# Altium PCB KATADC_V1-3.PcbDoc (part 2 of 7)
Units mm, origin at the board's own origin, x right, y up, seen from the top; angles counter-clockwise.
Board outline 127 x 85.85 mm, 6 copper layers (Top Layer, InnerPlane1, InnerPlane2, InnerPlane3, InnerPlane4, Bottom Layer), stack 1.255 mm thick; 189 components, 188 nets, 905 pads, 1090 vias.
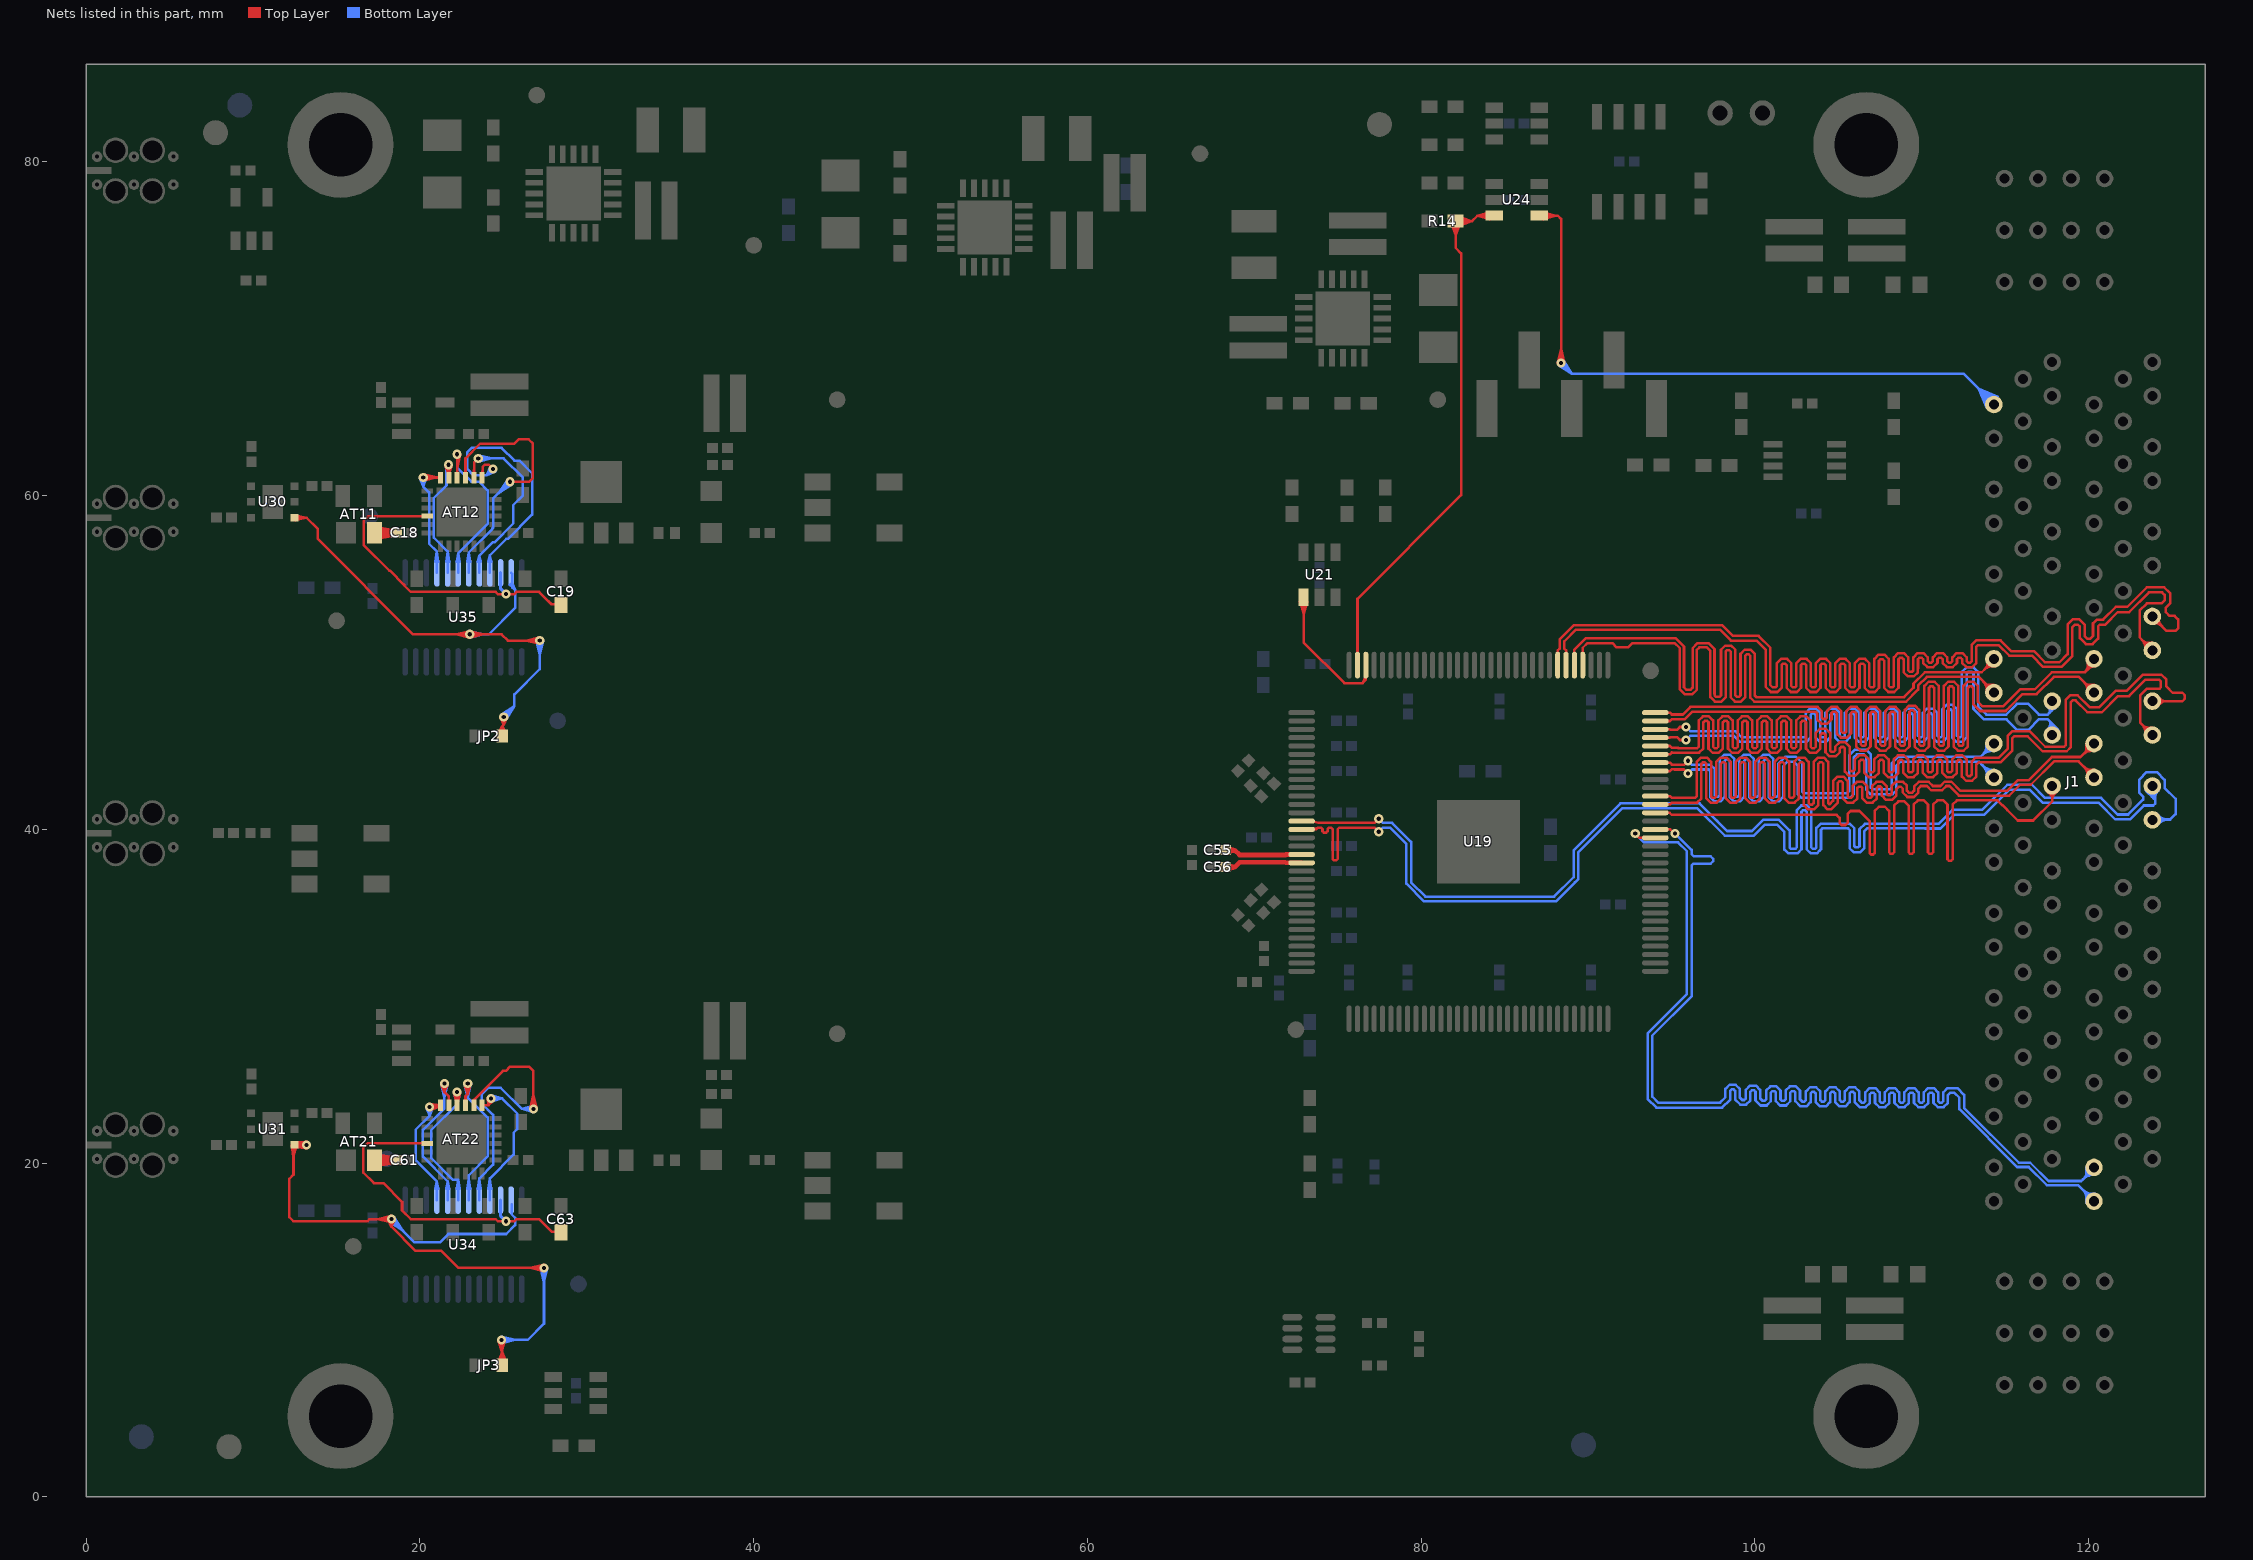
[diagram p6: the nets of this part, all layers, seen from the top]

## Via types
v1: diameter 0.55, hole 0.25, Top Layer to Bottom Layer, tented both sides, 1066 vias
v2: diameter 3.302, hole 2.2, Top Layer to Bottom Layer, tented both sides, 18 vias
v3: diameter 0.65, hole 0.25, Top Layer to Bottom Layer, tented both sides, 4 vias
v4: diameter 0.51, hole 0.25, Top Layer to Bottom Layer, tented both sides, 1 vias
v5: diameter 0.55, hole 0.25, Top Layer to Bottom Layer, 1 vias

## Nets (pads, with @x,y where several pads share a name; then routed paths per layer and width w, separated by ;. In a path a pad name is that pad's centre, name@x,y a point inside that pad or via, vN(x,y) a via of type N, cw(c..) or ccw(c..) an arc to the next point about the centre after c; other vN are vias at no path point) (continued)
CALRUN_19: U19.126 U21.1 | length 11.6
  Top Layer w0.152: U21.1@72.743,53.637 72.964,52.913 ; U21.1@72.964,53.67 72.964,52.913 ; U21.1@72.964,53.895 72.964,51.201 75.397,48.768 76.49,48.768 ; U21.1@73.185,53.637 72.964,52.913 ; U19.126@76.689,49.843 76.689,48.967 ; 76.49,48.768 76.689,48.967 ; 76.49,48.768 U19.126@76.689,49.193 ; 76.689,48.967 U19.126@76.689,49.193 ; 76.689,48.967 U19.126@76.689,49.193
CH1: AT11.2 C18.1 | length 7.9
  Top Layer w0.443: C18.1@18.575,57.764 AT11.2@17.272,57.764 C18.1@18.6,57.764 ; C18.1@18.575,57.764 17.291,57.986 C18.1@18.6,57.764 ; C18.1@18.575,57.764 17.291,57.542 C18.1@18.6,57.764
CH1_DAD0: AT12.24 U35.4 | length 12.3
  Top Layer w0.152: v1(20.193,61.087) 21.206,61.087 AT12.24@21.229,61.064 20.62,61.087 ; v1@20.217,60.89 21.027,61.087 v1@20.217,61.284
  Bottom Layer w0.152: v1@19.998,61.05 20.193,60.552 ; v1(20.193,61.087) 20.193,60.552 ; v1@20.388,61.05 20.193,60.552 ; U35.4@20.93,56.039 21.018,56.646 ; U35.4@21.018,55.372 21.018,56.646 ; U35.4@21.018,56.032 21.018,56.646 ; U35.4@21.107,56.039 21.018,56.646 ; 20.193,60.552 20.547,60.198 20.547,57.117 21.018,56.646
CH1_DAD1: AT12.23 U35.5 | length 13
  Top Layer w0.152: v1@21.522,61.811 AT12.23@21.729,61.264 ; v1@21.914,61.819 AT12.23@21.729,61.264 ; v1(21.717,61.849) v1@21.729,61.837 ; v1(21.717,61.849) AT12.23@21.729,61.064 v1@21.729,61.837 ; v1(21.717,61.849) AT12.23@21.729,61.264 ; AT12.23@21.729,61.264 v1@21.729,61.837
  Bottom Layer w0.152: U35.5@21.565,56.039 21.653,56.654 ; U35.5@21.653,55.372 21.653,56.654 ; U35.5@21.653,56.032 21.653,56.654 ; v1(21.717,61.849) 21.717,61.75 21.59,61.623 21.59,60.618 20.827,59.855 20.827,57.48 21.653,56.654 ; U35.5@21.742,56.039 21.653,56.654
CH1_DAD2: AT12.22 U35.6 | length 14.1
  Top Layer w0.152: AT12.22@22.229,61.064 22.229,62.48 v1(22.225,62.484) 22.229,61.65 v1@22.422,62.461 ; AT12.22@22.229,61.264 22.229,61.872
  Bottom Layer w0.152: U35.6@22.2,56.04 22.288,56.533 ; v1(22.225,62.484) 22.225,61.684 23.076,60.833 23.536,60.833 24.059,60.31 24.059,59.774 24.057,59.772 24.057,58.933 24.059,58.931 24.059,58.303 22.288,56.533 ; U35.6@22.288,55.372 22.288,56.533 ; U35.6@22.288,56.032 22.288,56.533 ; U35.6@22.377,56.04 22.288,56.533
CH1_DAD3: AT12.21 U35.7 | length 21
  Top Layer w0.152: AT12.21@22.729,61.064 22.729,62.226 23.61,63.107 23.888,63.107 23.894,63.113 25.654,63.113 25.914,63.373 26.518,63.373 26.772,63.119 26.772,61.043 26.561,60.833 v1(25.4,60.833) ; AT12.21@22.729,61.264 22.729,61.872
  Bottom Layer w0.152: U35.7@22.835,56.04 22.924,56.587 ; U35.7@22.924,55.372 22.924,56.587 ; U35.7@22.924,56.032 22.924,56.587 ; U35.7@23.012,56.04 22.924,56.587 ; v1@25.246,60.959 24.7,60.133 ; v1@25.526,60.679 24.7,60.133 ; 22.924,56.587 24.339,58.002 24.339,58.039 24.384,58.084 24.384,59.817 v1(25.4,60.833) 24.7,60.133
CH1_DAD4: AT12.20 U35.8 | length 14.6
  Top Layer w0.152: AT12.20@23.229,61.064 23.241,61.076 23.241,61.976 v1(23.495,62.23) ; AT12.20@23.229,61.264 23.241,61.872
  Bottom Layer w0.152: U35.8@23.47,56.043 23.558,56.401 ; v1(23.495,62.23) 25.019,62.23 26.162,61.087 26.162,60.008 25.59,59.436 25.59,58.333 24.454,57.196 24.354,57.196 23.558,56.401 ; v1@23.519,62.033 24.329,62.23 v1@23.519,62.427 ; U35.8@23.558,55.372 23.558,56.401 ; U35.8@23.558,56.032 23.558,56.401 ; U35.8@23.647,56.043 23.558,56.401
CH1_DAD5: AT12.19 U35.9 | length 18.7
  Top Layer w0.152: AT12.19@23.729,61.064 23.749,61.084 23.749,61.722 ; AT12.19@23.729,61.264 23.749,61.722 ; v1(24.384,61.595) 24.13,61.849 23.876,61.849 23.749,61.722
  Bottom Layer w0.152: U35.9@24.105,56.042 24.194,56.426 ; U35.9@24.194,55.372 24.194,56.426 ; U35.9@24.194,56.032 24.194,56.426 ; v1@24.22,61.707 24.003,61.214 ; U35.9@24.282,56.042 24.194,56.426 ; v1(24.384,61.595) 24.003,61.214 ; v1@24.496,61.431 24.003,61.214 ; 24.003,61.214 23.217,61.214 22.836,61.595 22.836,62.611 23.09,62.865 24.892,62.865 25.654,62.103 25.955,62.103 26.717,61.341 26.717,58.855 25.266,57.404 25.171,57.404 24.194,56.426
CH1_DALE: AT12.4 C19.1 U35.10 | length 20.9
  Top Layer w0.152: 19.622,58.764 AT12.4@20.229,58.764 ; AT12.4@20.429,58.764 16.892,58.764 16.624,58.496 16.624,57.033 18.158,55.499 18.199,55.499 19.05,54.648 19.05,54.627 19.448,54.229 24.535,54.229 24.662,54.102 v1(25.146,54.102) 25.654,54.102 25.781,54.229 27.146,54.229 27.712,53.663 ; 27.813,53.562 27.712,53.663 ; C19.1@28.4,53.5 27.875,53.5 27.712,53.663
  Bottom Layer w0.2: U35.10@24.828,55.372 24.828,54.422 v1(25.146,54.102) v1@25.15,54.1
CH1_TERM: JP2.2 U30.4 U35.11 | length 48.3
  Top Layer w0.152: U30.4@12.476,58.674 13.208,58.674 13.861,58.021 13.861,57.422 19.595,51.689 v1(22.987,51.689) 24.892,51.689 25.273,51.308 v1(27.178,51.308) ; U30.4@12.501,58.674 13.183,58.674 ; U30.4@12.517,58.526 13.183,58.674 ; U30.4@12.517,58.822 13.183,58.674 ; v1@22.963,51.492 22.153,51.689 v1@22.963,51.886 ; v1@23.011,51.492 23.821,51.689 v1@23.011,51.886 ; JP2.2@24.665,45.712 24.93,46.183 ; JP2.2@24.809,45.657 24.93,46.183 ; v1@24.825,46.693 25.019,46.272 ; JP2.2@24.93,45.593 24.93,46.183 ; JP2.2@24.93,45.643 24.93,46.183 ; v1(25.019,46.736) 25.019,46.272 ; JP2.2@25.051,45.657 24.93,46.183 ; JP2.2@25.195,45.712 24.93,46.183 ; v1@25.213,46.693 25.019,46.272 ; v1@27.154,51.111 26.344,51.308 v1@27.154,51.505 ; 24.93,46.183 25.019,46.272
  Bottom Layer w0.152: v1(22.987,51.689) 24.123,51.689 25.701,53.267 25.701,54.332 ; v1@23.011,51.492 23.821,51.689 v1@23.011,51.886 ; v1@24.895,46.891 25.661,47.378 ; v1(25.019,46.736) 25.661,47.378 ; v1@25.174,46.612 25.661,47.378 ; U35.11@25.393,54.657 25.701,54.332 ; U35.11@25.463,54.712 25.701,54.332 ; U35.11@25.463,55.372 25.539,55.296 25.539,54.494 25.701,54.332 ; U35.11@25.543,54.751 25.701,54.332 ; v1@26.981,51.284 27.178,50.474 ; v1@27.375,51.284 27.178,50.474 ; 25.661,47.378 25.661,48.09 27.178,49.608 v1(27.178,51.308) 27.178,50.474
CH2: AT21.2 C61.1 | length 7.9
  Top Layer w0.443: C61.1@18.575,20.172 AT21.2@17.272,20.172 C61.1@18.6,20.172 ; C61.1@18.575,20.172 17.291,20.394 C61.1@18.6,20.172 ; C61.1@18.575,20.172 17.291,19.95 C61.1@18.6,20.172
CH2_DAD0: AT22.24 U34.4 | length 14.8
  Top Layer w0.152: v1@20.572,23.567 AT22.24@21.229,23.472 ; v1@20.596,23.566 AT22.24@21.229,23.396 ; v1@20.611,23.396 AT22.24@21.229,23.472 ; v1@20.613,23.173 AT22.24@21.229,23.396 ; v1@20.634,23.179 AT22.24@21.229,23.472 ; v1(20.574,23.368) 20.574,23.396 AT22.24@21.229,23.396 ; v1(20.574,23.368) AT22.24@21.229,23.396 ; v1(20.574,23.368) AT22.24@21.229,23.472 ; AT22.24@21.229,23.396 AT22.24@21.229,23.472
  Bottom Layer w0.152: v1@20.379,23.331 20.574,22.831 ; v1@20.769,23.331 20.574,22.831 ; U34.4@20.93,18.449 21.018,18.893 ; U34.4@21.018,17.78 21.018,18.893 ; U34.4@21.018,18.44 21.018,18.893 ; U34.4@21.107,18.449 21.018,18.893 ; 20.574,22.831 v1(20.574,23.368) 20.574,22.831 ; 20.574,22.831 19.738,21.995 19.738,20.174 21.018,18.893
CH2_DAD1: AT22.23 U34.5 | length 13.9
  Top Layer w0.152: v1@21.268,24.726 21.463,24.257 ; v1(21.463,24.765) 21.463,24.257 ; v1@21.658,24.726 21.463,24.257 ; AT22.23@21.729,23.472 21.729,23.991 ; AT22.23@21.729,23.672 21.729,23.991 ; 21.463,24.257 21.729,23.991
  Bottom Layer w0.152: v1@21.266,24.741 21.463,23.931 v1@21.66,24.741 ; v1(21.463,24.765) 21.463,23.266 20.176,21.979 20.176,20.387 21.653,18.91 ; U34.5@21.565,18.449 21.653,18.91 ; U34.5@21.653,17.78 21.653,18.91 ; U34.5@21.653,18.44 21.653,18.91 ; U34.5@21.742,18.449 21.653,18.91
CH2_DAD2: AT22.22 U34.6 | length 16.6
  Top Layer w0.152: v1@22.028,24.231 AT22.22@22.229,23.472 ; v1@22.029,24.222 AT22.22@22.229,23.672 ; v1@22.421,24.225 AT22.22@22.229,23.672 ; v1@22.422,24.233 AT22.22@22.229,23.472 ; v1(22.225,24.257) v1@22.229,24.257 ; v1(22.225,24.257) AT22.22@22.229,23.472 ; v1(22.225,24.257) AT22.22@22.229,23.672 ; AT22.22@22.229,23.472 v1@22.229,24.257 ; AT22.22@22.229,23.672 v1@22.229,24.257
  Bottom Layer w0.152: v1@22.028,24.23 22.225,23.521 ; U34.6@22.2,18.447 22.288,19.005 ; v1(22.225,24.257) 22.225,23.521 ; U34.6@22.288,17.78 22.288,19.005 ; U34.6@22.288,18.44 22.288,19.005 ; U34.6@22.377,18.447 22.288,19.005 ; v1@22.422,24.23 22.225,23.521 ; 22.225,23.521 20.675,21.97 20.675,20.289 21.958,19.005 22.288,19.005
CH2_DAD3: AT22.21 U34.7 | length 15.1
  Top Layer w0.152: v1@22.664,24.734 22.86,24.13 ; AT22.21@22.729,23.472 22.729,23.999 ; AT22.21@22.729,23.672 22.729,23.999 ; v1@23.056,24.734 22.86,24.13 ; 22.729,23.999 22.86,24.13 ; 22.86,24.13 v1(22.86,24.765) 22.86,24.13
  Bottom Layer w0.152: v1@22.663,24.741 22.86,23.935 ; U34.7@22.835,18.447 22.924,19.063 ; v1(22.86,24.765) 22.86,23.935 ; U34.7@22.924,17.78 22.924,19.258 24.059,20.394 24.059,22.736 22.86,23.935 ; U34.7@22.924,18.44 22.924,19.063 ; U34.7@23.012,18.447 22.924,19.063 ; v1@23.057,24.741 22.86,23.935
CH2_DAD4: AT22.20 U34.8 | length 23.4
  Top Layer w0.152: AT22.20@23.229,23.472 23.229,23.779 24.977,25.527 25.146,25.527 25.4,25.781 26.543,25.781 26.797,25.527 v1(26.797,23.241) ; v1@26.6,23.265 26.797,24.075 v1@26.994,23.265
  Bottom Layer w0.152: U34.8@23.47,18.447 23.558,19.063 ; U34.8@23.558,17.78 23.558,19.085 24.384,19.911 24.384,22.885 23.702,23.567 23.702,24.106 24.106,24.511 24.836,24.511 26.106,23.241 ; U34.8@23.558,18.44 23.558,19.063 ; U34.8@23.647,18.447 23.558,19.063 ; v1@26.768,23.044 26.106,23.241 ; v1@26.768,23.438 26.106,23.241 ; 26.106,23.241 v1(26.797,23.241) 26.106,23.241
CH2_DAD5: AT22.19 U34.9 | length 13.1
  Top Layer w0.152: AT22.19@23.729,23.472 24.107,23.472 ; v1@24.06,23.9 24.107,23.472 ; v1@24.422,23.766 24.107,23.472 ; 24.107,23.472 24.257,23.622 v1(24.257,23.876) 24.107,23.472
  Bottom Layer w0.152: U34.9@24.105,18.447 24.194,19.063 ; U34.9@24.194,17.78 24.194,19.085 25.615,20.507 25.615,21.816 25.828,22.029 25.828,22.963 24.916,23.876 ; U34.9@24.194,18.44 24.194,19.063 ; v1(24.257,23.876) 24.916,23.876 ; U34.9@24.282,18.447 24.194,19.063 ; v1@24.287,23.68 24.916,23.876 ; v1@24.287,24.072 24.916,23.876
CH2_DALE: AT22.4 C63.1 U34.10 | length 21.1
  Top Layer w0.152: 19.622,21.172 AT22.4@20.229,21.172 ; AT22.4@20.429,21.172 16.856,21.172 16.599,20.915 16.599,19.43 17.233,18.796 17.804,18.796 18.923,17.677 18.923,17.162 19.448,16.637 24.535,16.637 24.662,16.51 v1(25.146,16.51) 25.654,16.51 25.781,16.637 27.146,16.637 27.908,15.875 C63.1@28.375,15.875
  Bottom Layer w0.2: U34.10@24.828,17.78 24.828,16.822 25.143,16.507 v1@25.15,16.5
CH2_TERM: JP3.2 U31.4 U34.11 | length 66.7
  Top Layer w0.152: U31.4@12.327,21.078 12.419,20.393 ; U31.4@12.622,21.054 12.419,20.393 ; v1@13.139,20.895 U31.4@12.517,21.23 ; v1@13.139,21.269 U31.4@12.517,20.934 ; v1@13.18,20.885 U31.4@12.501,21.082 ; v1@13.18,21.279 U31.4@12.501,21.082 ; v1@13.181,20.885 U31.4@12.476,21.082 ; v1@13.181,21.279 U31.4@12.476,21.082 ; v1@13.222,20.884 U31.4@12.517,20.934 ; v1@13.222,21.28 U31.4@12.517,21.23 ; v1@18.094,16.593 18.288,16.187 ; v1@18.264,16.44 17.454,16.637 v1@18.264,16.834 ; v1@18.482,16.593 18.288,16.187 ; JP3.2@24.661,7.974 24.93,8.68 ; v1@24.695,9.369 24.892,8.718 ; JP3.2@24.809,7.934 24.93,8.68 ; v1(24.892,9.398) 24.892,8.718 ; JP3.2@24.93,7.874 24.93,8.68 ; JP3.2@24.93,7.924 24.93,8.68 ; JP3.2@25.051,7.934 24.93,8.68 ; v1@25.089,9.369 24.892,8.718 ; JP3.2@25.199,7.974 24.93,8.68 ; v1@27.408,13.519 26.598,13.716 v1@27.408,13.913 ; v1(27.432,13.716) 22.304,13.716 21.288,14.732 19.743,14.732 18.288,16.187 ; 12.419,20.393 U31.4@12.476,21.082 ; U31.4@12.476,21.082 12.419,21.025 12.419,19.304 12.165,19.05 12.165,16.764 12.419,16.51 16.854,16.51 16.981,16.637 v1(18.288,16.637) ; U31.4@12.476,21.082 v1(13.208,21.082) ; U31.4@12.501,21.082 v1@13.183,21.082 ; U31.4@12.501,21.082 v1(13.208,21.082) ; U31.4@12.517,20.934 v1@13.183,21.082 ; U31.4@12.517,20.934 v1(13.208,21.082) ; U31.4@12.517,21.23 v1@13.183,21.082 ; U31.4@12.517,21.23 v1(13.208,21.082) ; 18.288,16.187 v1(18.288,16.637) ; 18.288,16.187 v1(18.288,16.637) ; 24.892,8.718 24.93,8.68
  Bottom Layer w0.152: v1@18.162,16.483 18.988,15.937 v1@18.442,16.763 ; v1(18.288,16.637) 19.685,15.24 21.191,15.24 21.699,15.748 25.17,15.748 25.705,16.283 25.705,16.72 25.5,16.925 U34.11@25.5,17.525 ; v1(24.892,9.398) 26.46,9.398 27.432,10.37 v1(27.432,13.716) ; v1@24.916,9.201 25.726,9.398 v1@24.916,9.595 ; v1@27.235,13.692 27.432,12.882 v1@27.629,13.692
CLK+: C55.2 U19.18 | length 6.6
  Top Layer w0.285: C55.2@68.268,38.751 68.834,38.751 ; C55.2@68.293,38.751 68.834,38.751 ; C55.2@68.316,38.595 68.834,38.751 ; C55.2@68.316,38.907 68.834,38.751 ; U19.18@72.189,38.493 71.896,38.493 ; U19.18@72.839,38.493 71.896,38.493 ; 68.834,38.751 69.123,38.462 71.894,38.462 71.894,38.49 71.896,38.493
CLK-: C56.2 U19.19 | length 6.6
  Top Layer w0.285: C56.2@68.268,37.735 68.834,37.735 ; C56.2@68.293,37.735 68.834,37.735 ; C56.2@68.316,37.579 68.834,37.735 ; C56.2@68.316,37.891 68.834,37.735 ; U19.19@72.189,37.993 71.895,37.993 ; U19.19@72.839,37.993 71.895,37.993 ; 68.834,37.735 69.123,38.024 71.864,38.024 71.895,37.993
CS_ADC_19: R14.2 U19.127 U24.6 | length 42.2
  Top Layer w0.152: U19.127@76.189,49.843 76.189,53.817 82.398,60.026 82.398,74.524 82.067,74.854 R14.2@82.067,76.454 83.058,76.454 83.378,76.774 U24.6@84.375,76.774 ; U19.127@76.189,50.493 76.189,51.1 ; R14.2@81.768,76.399 82.067,75.616 ; R14.2@81.916,76.44 82.067,75.616 ; R14.2@82.169,76.454 83.007,76.454 ; R14.2@82.183,76.302 83.007,76.454 ; R14.2@82.183,76.606 83.007,76.454 ; R14.2@82.219,76.44 82.067,75.616 ; R14.2@82.224,76.154 83.007,76.454 ; R14.2@82.224,76.754 83.007,76.454 ; R14.2@82.367,76.399 82.067,75.616 ; U24.6@84.117,76.553 83.393,76.774 ; U24.6@84.117,76.995 83.393,76.774 ; U24.6@84.15,76.774 83.393,76.774
CS_ADC_25: J1.F1 U24.1 | length 50.1
  Top Layer w0.152: U24.1@87.075,76.774 88.199,76.774 88.392,76.581 v1(88.392,67.945) ; U24.1@87.3,76.774 88.057,76.774 ; U24.1@87.333,76.553 88.057,76.774 ; U24.1@87.333,76.995 88.057,76.774 ; v1@88.195,67.969 88.392,68.779 v1@88.589,67.969
  Bottom Layer w0.152: v1@88.268,67.79 89.027,67.31 ; v1(88.392,67.945) 89.027,67.31 ; v1@88.547,68.069 89.027,67.31 ; J1.F1@113.907,65.265 113.427,66.403 ; J1.F1@114.045,65.334 113.427,66.403 ; J1.F1@114.173,65.419 113.427,66.403 ; J1.F1@114.3,65.53 112.52,67.31 89.027,67.31 ; J1.F1@114.411,65.657 113.427,66.403 ; J1.F1@114.496,65.785 113.427,66.403 ; J1.F1@114.565,65.923 113.427,66.403
DCLK+: J1.C19 U19.82 | length 67.5
  Top Layer w0.152: U19.82@94.039,39.993 94.932,39.993 v1@95.199,39.726
  Bottom Layer w0.152: v1(95.213,39.751) v1@95.219,39.745 ; v1@95.225,39.751 96.211,38.765 96.211,38.511 96.342,38.379 97.358,38.379 97.511,38.227 97.511,38.1 97.358,37.948 96.317,37.948 96.211,37.842 96.211,29.993 93.853,27.635 93.853,23.978 94.209,23.622 97.46,23.622 ; 97.434,23.622 97.917,23.622 98.238,23.943 98.238,24.44 98.491,24.693 98.849,24.693 99.102,24.44 99.102,23.919 99.191,23.83 ; 99.153,23.868 99.242,23.779 99.368,23.779 99.457,23.868 99.457,24.39 99.71,24.642 100.068,24.642 100.321,24.39 100.321,23.868 100.41,23.779 ; 100.372,23.817 100.461,23.728 100.587,23.728 100.677,23.817 100.677,24.339 100.93,24.592 101.287,24.592 101.54,24.339 101.54,23.817 101.63,23.728 101.756,23.728 101.845,23.817 101.845,24.339 102.098,24.592 102.456,24.592 102.709,24.339 102.709,23.817 102.798,23.728 ; 102.759,23.767 102.849,23.677 102.975,23.677 103.064,23.767 103.064,24.288 103.317,24.541 103.675,24.541 103.928,24.288 103.928,23.767 104.017,23.677 104.143,23.677 104.233,23.767 104.233,24.288 104.486,24.541 104.843,24.541 105.096,24.288 105.096,23.767 105.19,23.673 105.308,23.673 ; 105.312,23.677 105.401,23.767 105.401,24.288 105.654,24.541 106.012,24.541 106.265,24.288 106.265,23.767 106.354,23.677 ; 106.315,23.716 106.405,23.626 106.531,23.626 106.62,23.716 106.62,24.237 106.873,24.49 107.231,24.49 107.484,24.237 107.484,23.716 107.573,23.626 107.699,23.626 107.789,23.716 107.789,24.237 108.042,24.49 108.399,24.49 108.652,24.237 108.652,23.716 108.742,23.626 108.868,23.626 108.957,23.716 108.957,24.237 109.21,24.49 109.568,24.49 109.821,24.237 109.821,23.716 109.91,23.626 110.036,23.626 110.125,23.716 110.125,24.237 110.378,24.49 110.736,24.49 110.989,24.237 110.989,23.716 111.078,23.626 111.205,23.626 111.294,23.716 111.294,24.237 111.547,24.49 112.137,24.49 112.548,24.079 112.548,23.292 115.825,20.016 116.509,20.016 117.602,18.923 119.558,18.923 119.658,19.023 ; J1.C19@119.875,19.75 119.875,19.74 119.875,19.37 cw(c119.562,19.37) 119.783,19.148 ; J1.C19@120.345,19.71 119.783,19.148 ; J1.C19@120.375,19.3 120.326,19.3 ccw(c120.326,18.356) 119.658,19.023 ; 119.658,19.023 119.783,19.148
DCLK-: J1.C20 U19.81 | length 68
  Top Layer w0.152: v1(92.833,39.751) 93.091,39.493 ; U19.81@93.389,39.493 93.091,39.493 ; U19.81@94.039,39.493 93.091,39.493
  Bottom Layer w0.152: v1@92.837,39.726 93.349,39.213 95.406,39.213 95.931,38.687 95.931,30.12 93.574,27.762 93.574,24.206 ; 93.574,24.232 93.574,24.206 ; 106.238,23.398 105.985,23.651 105.985,24.172 105.896,24.261 105.77,24.261 105.68,24.172 105.68,23.651 105.428,23.398 105.07,23.398 104.817,23.651 104.817,24.172 104.728,24.261 104.601,24.261 104.512,24.172 104.512,23.651 104.259,23.398 103.901,23.398 103.648,23.651 103.648,24.172 103.559,24.261 103.433,24.261 103.344,24.172 103.344,23.651 103.091,23.398 102.733,23.398 102.429,23.702 102.429,24.223 102.34,24.312 102.214,24.312 102.124,24.223 102.124,23.702 101.872,23.449 101.514,23.449 101.261,23.702 101.261,24.223 101.172,24.312 101.045,24.312 100.956,24.223 100.956,23.702 100.703,23.449 100.345,23.449 100.042,23.752 100.042,24.274 99.952,24.363 99.826,24.363 99.737,24.274 99.737,23.752 99.484,23.499 99.126,23.499 98.822,23.803 98.822,24.325 98.733,24.414 98.607,24.414 98.518,24.325 98.518,23.791 98.044,23.317 94.107,23.317 93.574,23.851 93.574,24.206 ; 106.289,23.347 106.647,23.347 106.9,23.6 106.9,24.121 106.989,24.211 107.115,24.211 107.204,24.121 107.204,23.6 107.457,23.347 107.815,23.347 108.068,23.6 108.068,24.121 108.157,24.211 108.284,24.211 108.373,24.121 108.373,23.6 108.626,23.347 108.984,23.347 109.236,23.6 109.236,24.121 109.326,24.211 109.452,24.211 109.541,24.121 109.541,23.6 109.794,23.347 110.152,23.347 110.405,23.6 110.405,24.121 110.494,24.211 110.62,24.211 110.71,24.121 110.71,23.6 110.963,23.347 111.32,23.347 111.573,23.6 111.573,24.07 111.709,24.206 111.963,24.206 112.255,23.914 112.255,23.228 115.72,19.763 116.405,19.763 117.497,18.671 119.378,18.671 119.627,18.422 ; J1.C20@119.875,17.625 119.875,17.71 119.875,17.929 ccw(c119.284,17.929) 119.702,18.347 ; J1.C20@120.345,17.704 120.332,17.717 119.702,18.347 ; J1.C20@120.4,18.15 120.325,18.15 120.284,18.15 cw(c120.284,19.079) 119.627,18.422 ; 119.627,18.422 119.702,18.347
DCLK_RST+: J1.A11 U19.15 | length 78.8
  Top Layer w0.152: U19.15@72.839,39.993 73.715,39.993 ; v1(77.461,39.854) 77.212,40.103 75.093,40.103 75.004,40.014 75.004,38.224 74.915,38.134 74.789,38.134 74.699,38.224 74.699,40.014 74.61,40.103 74.484,40.103 74.395,40.014 74.395,39.888 74.305,39.799 74.179,39.799 74.09,39.888 74.09,40.014 74,40.103 73.826,40.103 ; U19.15@73.489,39.993 73.826,40.103 ; U19.15@73.489,39.993 73.715,39.993 ; U19.15@73.489,39.993 73.715,39.993 ; 73.715,39.993 73.826,40.103
  Bottom Layer w0.152: v1(77.461,39.854) 77.71,40.103 78.147,40.103 79.119,39.131 79.119,36.749 80.181,35.687 88.093,35.687 89.22,36.815 89.408,37.002 89.408,38.608 92.075,41.275 96.545,41.275 98.2,39.621 99.946,39.621 100.609,40.284 101.321,40.284 101.778,39.827 101.778,38.786 102.01,38.554 102.546,38.554 102.799,38.807 ; 102.799,38.811 102.799,41.052 102.895,41.148 ; 102.946,41.148 103.022,41.148 103.104,41.066 103.104,38.81 ; 103.104,38.807 103.357,38.554 103.715,38.554 103.886,38.725 ; 103.884,38.726 103.968,38.81 103.968,39.963 104.057,40.052 105.588,40.052 105.689,39.951 105.689,38.862 105.918,38.633 106.324,38.633 106.553,38.862 106.553,39.192 ; 106.553,39.218 106.553,39.877 106.729,40.052 110.204,40.052 ; 110.207,40.049 111.125,40.049 111.959,40.883 113.756,40.883 115.24,42.367 116.484,42.367 117.272,41.58 120.625,41.58 121.602,40.602 122.488,40.602 123.314,41.427 123.876,41.427 124.003,41.554 124.003,41.758 ; J1.A11@123.4,42.525 ccw(c123.797,42.525) 123.516,42.244 123.8,41.961 ; J1.A11@123.8,42.545 123.8,41.961 ; J1.A11@123.9,42.225 123.9,42.061 ; J1.A11@124.081,42.242 123.9,42.061 ; J1.A11@124.081,42.242 cw(c124.1,42.223) J1.A11@124.1,42.25 ; J1.A11@124.175,42.325 ccw(c124.591,41.909) 124.003,41.909 124.003,41.758 ; 123.8,41.961 123.932,41.828 ; 123.8,41.961 123.9,42.061 ; 123.9,42.061 123.9,41.906 ccw(c124.01,41.906) 123.932,41.828 ; 123.932,41.828 124.003,41.758
DCLK_RST-: J1.A12 U19.14 | length 77.8
  Top Layer w0.152: U19.14@73.489,40.493 73.826,40.383 77.212,40.383 v1(77.461,40.632)
  Bottom Layer w0.152: v1(77.461,40.632) 77.71,40.383 78.263,40.383 79.399,39.247 79.399,36.826 80.259,35.966 87.977,35.966 89.137,37.126 89.137,38.743 91.948,41.554 96.687,41.554 97.734,40.508 98.341,39.9 99.833,39.9 100.496,40.564 101.448,40.564 102.083,39.929 102.083,38.913 102.162,38.833 102.431,38.833 102.522,38.925 102.522,39.573 ; 102.52,39.558 102.52,41.153 102.794,41.427 103.124,41.427 103.383,41.168 103.383,39.558 ; 103.381,38.938 103.381,39.556 ; 103.383,38.923 103.473,38.833 103.599,38.833 103.688,38.923 ; 103.688,38.944 103.688,40.079 103.941,40.332 105.701,40.332 105.967,40.066 105.967,39.905 ; 105.969,39.903 105.969,38.989 106.045,38.913 106.197,38.913 106.274,38.989 106.274,39.065 ; 106.276,39.065 106.276,40.007 106.598,40.33 106.655,40.33 ; 106.655,40.332 111.006,40.332 ; 111.009,40.329 111.843,41.163 113.629,41.163 115.138,42.672 116.611,42.672 117.399,41.885 120.752,41.885 121.747,40.889 122.352,40.889 ; 122.352,40.881 122.373,40.881 123.269,41.777 123.269,41.957 123.047,42.179 123.047,42.982 123.488,43.423 124.112,43.423 124.566,42.969 124.566,42.49 125.222,41.834 125.222,40.919 124.892,40.589 124.756,40.589 ; J1.A12@123.927,40.589 124.756,40.589 ; J1.A12@124.1,40.225 124.135,40.26 124.258,40.383 cw(c124.756,39.885) 124.756,40.589 ; J1.A12@124.1,40.925 124.14,40.885 124.209,40.816 ccw(c124.756,41.362) 124.756,40.589
DI0+: J1.A7 U19.103 | length 77.3
  Top Layer w0.152: U19.103@88.189,50.493 88.189,50.719 88.299,50.83 88.299,51.383 89.16,52.243 98.03,52.243 98.682,51.591 100.224,51.591 100.926,50.889 100.926,48.66 101.076,48.509 101.232,48.509 101.322,48.599 101.322,49.961 101.575,50.214 101.932,50.214 102.185,49.961 102.185,48.6 102.274,48.511 102.401,48.511 102.49,48.6 102.49,49.96 102.743,50.213 103.101,50.213 103.354,49.96 103.354,48.6 103.443,48.511 103.569,48.511 103.658,48.6 103.658,49.958 103.911,50.211 104.269,50.211 104.522,49.958 104.522,48.6 104.611,48.511 104.738,48.511 104.827,48.6 104.827,49.958 105.08,50.211 105.437,50.211 105.69,49.958 105.69,48.6 105.78,48.511 105.906,48.511 105.995,48.6 105.995,49.958 106.248,50.211 106.606,50.211 106.859,49.958 106.859,48.6 106.948,48.511 107.074,48.511 107.164,48.6 107.164,50.218 107.417,50.471 107.774,50.471 108.027,50.218 108.027,48.6 108.116,48.511 108.243,48.511 108.332,48.6 108.332,50.306 108.585,50.559 108.943,50.559 109.196,50.306 109.196,49.529 109.285,49.44 109.411,49.44 109.49,49.52 109.49,49.762 ; 109.5,49.772 109.5,50.308 109.753,50.561 110.111,50.561 110.364,50.308 110.364,50.085 110.453,49.996 110.58,49.996 110.669,50.085 110.669,50.31 110.922,50.563 111.279,50.563 111.532,50.31 111.532,50.085 111.622,49.996 111.748,49.996 111.837,50.085 111.837,50.31 112.09,50.563 112.448,50.563 112.701,50.31 112.701,50.085 112.79,49.996 112.916,49.996 113.006,50.085 113.006,51.066 113.259,51.319 113.624,51.319 ; 113.628,51.323 114.728,51.323 115.366,50.685 116.72,50.685 117.392,50.013 118.255,50.013 118.75,50.508 118.75,52.279 119.075,52.603 119.431,52.603 119.761,52.273 119.761,51.587 119.939,51.41 120.091,51.41 120.269,51.587 120.269,52.34 120.498,52.569 120.869,52.569 121.641,53.34 122.328,53.34 123.496,54.508 124.536,54.508 124.892,54.153 124.892,53.543 124.638,53.289 124.638,53.01 124.854,52.794 125.158,52.794 125.374,52.578 125.374,52.045 125.222,51.892 124.663,51.892 J1.A7@123.825,52.73 ; J1.A7@123.775,52.35 123.825,52.35 124.037,52.35 cw(c124.037,51.921) 124.283,52.273 cw(c124.037,51.921) 124.341,52.224 ; J1.A7@123.8,52.73 J1.A7@123.825,52.73 ; J1.A7@123.8,52.756 123.81,52.745 J1.A7@123.825,52.73 ; J1.A7@123.825,52.756 J1.A7@123.825,52.73 ; J1.A7@124.2,52.8 124.2,52.76 124.2,52.652 ccw(c124.893,52.652) 124.403,52.162
DI0-: J1.A8 U19.102 | length 77.4
  Top Layer w0.152: U19.102@88.689,49.843 88.689,50.719 ; U19.102@88.689,50.493 88.689,50.719 ; 123.197,51.363 cw(c122.707,50.873) 123.4,50.873 123.4,50.73 J1.A8@123.4,50.725 ; 123.259,51.301 ccw(c123.563,51.604) 123.331,51.243 ccw(c123.563,51.604) 123.563,51.175 J1.A8@123.825,51.175 ; J1.A8@123.85,50.724 123.835,50.74 123.063,51.511 123.063,53.111 123.495,53.543 124.384,53.543 124.562,53.721 124.562,54.051 124.409,54.204 123.622,54.204 122.428,53.01 121.742,53.01 121.006,52.273 120.675,52.273 120.574,52.172 120.574,51.435 120.244,51.105 119.837,51.105 119.482,51.46 119.482,52.146 119.355,52.273 119.177,52.273 119.028,52.124 119.028,50.39 118.371,49.733 117.276,49.733 116.604,50.405 115.25,50.405 114.612,51.043 113.743,51.043 113.74,51.04 113.374,51.04 113.285,50.951 113.285,49.97 113.032,49.717 112.674,49.717 112.421,49.97 112.421,50.194 112.332,50.283 112.206,50.283 112.117,50.194 112.117,49.97 111.864,49.717 111.506,49.717 111.253,49.97 111.253,50.194 111.164,50.284 111.037,50.284 110.948,50.194 110.948,49.97 110.695,49.717 110.338,49.717 110.085,49.97 110.085,50.192 109.995,50.282 109.869,50.282 109.78,50.192 109.78,49.656 109.77,49.646 109.77,49.404 109.527,49.161 109.169,49.161 108.916,49.414 108.916,50.19 108.827,50.28 108.701,50.28 108.611,50.19 108.611,48.484 108.358,48.231 108.001,48.231 107.748,48.484 107.748,50.102 107.659,50.192 107.532,50.192 107.443,50.102 107.443,48.484 107.19,48.231 106.832,48.231 106.579,48.484 106.579,49.843 106.49,49.932 106.364,49.932 106.275,49.843 106.275,48.484 106.022,48.231 105.664,48.231 105.411,48.484 105.411,49.843 105.322,49.932 105.195,49.932 105.106,49.843 105.106,48.484 104.853,48.231 104.496,48.231 104.243,48.484 104.243,49.842 104.153,49.932 104.027,49.932 103.938,49.842 103.938,48.484 103.685,48.231 103.327,48.231 103.074,48.484 103.074,49.845 102.985,49.934 102.859,49.934 102.769,49.845 102.769,48.484 102.516,48.231 102.159,48.231 101.906,48.484 101.906,49.845 101.817,49.935 101.69,49.935 101.601,49.845 101.601,48.483 101.348,48.23 100.96,48.23 100.646,48.544 100.646,50.679 100.646,50.773 100.108,51.312 98.567,51.312 97.915,51.964 89.276,51.964 88.579,51.267 88.579,50.83 88.689,50.719
DI1+: J1.F7 U19.101 | length 48.3
  Top Layer w0.152: U19.101@89.189,49.843 89.189,50.776 ; U19.101@89.189,50.493 89.189,50.776 ; 97.585,48.111 97.585,50.803 97.234,51.154 96.568,51.154 96.268,50.854 96.268,48.49 96.139,48.362 95.91,48.362 95.756,48.516 95.756,50.955 95.251,51.46 89.873,51.46 89.189,50.776 ; 97.587,48.108 97.587,48.031 97.681,47.937 97.885,47.937 97.975,48.026 97.975,50.762 98.227,51.015 98.585,51.015 98.838,50.762 98.838,48.026 98.927,47.937 99.054,47.937 99.143,48.026 99.143,50.517 99.396,50.77 99.754,50.77 100.007,50.517 100.007,48.015 100.042,47.98 100.096,47.925 100.101,47.925 100.102,47.927 108.949,47.927 109.511,48.488 109.511,48.734 110.191,49.415 113.6,49.415 J1.F7@114.351,50.165 ; 113.762,49.572 cw(c114.252,49.082) 114.252,49.775 J1.F7@114.4,49.775 ; 113.824,49.634 ccw(c113.521,49.938) 113.857,49.671 ccw(c113.521,49.938) 113.95,49.938 J1.F7@113.95,50.2
DI1-: J1.F8 U19.100 | length 48.4
  Top Layer w0.152: U19.100@89.689,49.843 89.689,50.881 ; U19.100@89.689,50.493 89.689,50.881 ; 97.643,47.658 98.001,47.658 98.254,47.911 98.254,50.647 98.343,50.736 98.469,50.736 98.559,50.647 98.559,47.911 98.812,47.658 99.169,47.658 99.422,47.911 99.422,50.401 99.512,50.49 99.638,50.49 99.727,50.401 99.727,47.899 99.98,47.646 100.217,47.646 100.218,47.647 109.065,47.647 109.79,48.373 109.79,48.619 110.307,49.135 113.425,49.135 114.348,48.213 114.351,48.209 114.351,48.19 J1.F8@114.351,48.184 ; 97.866,47.653 97.608,47.653 97.333,47.928 97.333,50.698 97.13,50.902 96.672,50.902 96.52,50.749 96.52,48.362 96.241,48.082 95.809,48.082 95.504,48.387 95.504,50.851 95.199,51.156 92.659,51.156 92.405,50.902 91.719,50.902 91.465,51.156 89.964,51.156 89.689,50.881 ; 113.697,48.838 cw(c113.207,48.348) 113.9,48.348 J1.F8@113.9,48.2 ; 113.759,48.776 ccw(c114.063,49.079) 113.858,48.702 ccw(c114.063,49.079) 114.063,48.65 J1.F8@114.325,48.65
DI2+: J1.C7 U19.96 | length 67.8
  Top Layer w0.152: U19.96@94.039,46.993 94.915,46.993 95.026,46.883 95.689,46.883 96.14,47.334 103.76,47.334 104.013,47.081 104.013,46.701 104.102,46.611 104.228,46.611 104.318,46.701 104.318,47.083 104.57,47.336 104.928,47.336 105.181,47.083 105.181,45.868 105.27,45.779 105.397,45.779 105.486,45.868 105.486,47.083 105.739,47.336 106.097,47.336 106.35,47.083 106.35,45.087 106.439,44.997 106.565,44.997 106.654,45.087 106.654,47.083 106.907,47.336 107.265,47.336 107.518,47.083 107.518,45.087 107.607,44.997 107.733,44.997 107.823,45.087 107.823,47.083 108.076,47.336 108.433,47.336 108.686,47.083 108.686,45.09 108.776,45.001 108.902,45.001 108.991,45.09 108.991,47.161 109.244,47.414 109.602,47.414 109.855,47.161 109.855,45.09 109.944,45.001 110.07,45.001 110.16,45.09 110.16,48.593 110.412,48.846 110.77,48.846 111.023,48.593 111.023,45.09 111.112,45.001 111.239,45.001 111.328,45.09 111.328,48.593 111.581,48.846 111.939,48.846 112.192,48.593 112.192,45.09 112.281,45.001 112.407,45.001 112.496,45.09 112.496,48.593 112.749,48.846 113.107,48.846 113.36,48.593 113.36,47.65 113.639,47.371 114.884,47.371 115.9,48.387 116.776,48.387 117.804,49.415 119.798,49.415 119.928,49.545 ; 119.762,49.422 cw(c120.252,48.932) 119.928,49.545 ; 119.824,49.484 ccw(c119.521,49.788) 119.95,49.788 J1.C7@119.95,50.05 ; J1.C7@120.05,49.775 J1.C7@120.158,49.775 ; J1.C7@120.32,50.216 120.32,49.936 J1.C7@120.158,49.775 ; 119.928,49.545 J1.C7@120.158,49.775 ; 119.928,49.545 119.988,49.604 cw(c120.4,49.192) 120.4,49.775 120.325,49.775 J1.C7@120.158,49.775
DI2-: J1.C8 U19.95 | length 67.4
  Top Layer w0.152: U19.95@94.039,46.493 94.915,46.493 95.026,46.603 95.805,46.603 96.256,47.054 103.644,47.054 103.733,46.965 103.733,46.585 103.986,46.332 104.344,46.332 104.597,46.585 104.597,46.967 104.686,47.057 104.812,47.057 104.902,46.967 104.902,45.752 105.155,45.5 105.512,45.5 105.765,45.752 105.765,46.967 105.855,47.057 105.981,47.057 106.07,46.967 106.07,44.971 106.323,44.718 106.681,44.718 106.934,44.971 106.934,46.967 107.023,47.057 107.149,47.057 107.239,46.967 107.239,44.971 107.491,44.718 107.849,44.718 108.102,44.971 108.102,46.967 108.191,47.057 108.318,47.057 108.407,46.967 108.407,44.974 108.66,44.722 109.018,44.722 109.271,44.974 109.271,47.046 109.36,47.135 109.486,47.135 109.575,47.046 109.575,44.974 109.828,44.722 110.186,44.722 110.439,44.974 110.439,48.477 110.528,48.566 110.654,48.566 110.744,48.477 110.744,44.974 110.997,44.722 111.354,44.722 111.607,44.974 111.607,48.477 111.697,48.566 111.823,48.566 111.912,48.477 111.912,44.974 112.165,44.722 112.523,44.722 112.776,44.974 112.776,48.477 112.865,48.566 112.991,48.566 113.081,48.477 113.081,47.498 113.487,47.092 115.037,47.092 115.291,47.346 ; 115.291,47.345 116.044,48.098 116.882,48.098 117.919,49.135 119.425,49.135 120.32,48.24 120.32,48.19 J1.C8@120.32,48.158 ; 119.722,48.838 cw(c119.232,48.348) 119.73,48.83 cw(c119.232,48.348) 119.925,48.348 J1.C8@119.925,48.2 ; 119.784,48.776 ccw(c120.088,49.079) 120.088,48.65 120.325,48.65 J1.C8@120.35,48.65
DI3+: J1.D9 U19.94 | length 58.1
  Top Layer w0.152: U19.94@94.039,45.993 94.915,45.993 ; U19.94@94.689,45.993 94.915,45.993 ; v1(95.883,46.132) 95.507,46.132 95.353,45.979 94.93,45.979 94.915,45.993
  Bottom Layer w0.152: v1(95.883,46.132) 96.132,45.883 98.847,45.883 98.933,45.796 ; 98.908,45.822 98.933,45.796 ; J1.D9@117.5,47.4 ccw(c117.555,47.4) 117.516,47.361 J1.D9@117.675,47.202 ; 117.675,47 117.629,46.954 ; J1.D9@117.675,47.3 J1.D9@117.675,47.202 ; J1.D9@117.7,47.375 J1.D9@117.7,47.177 ; J1.D9@117.8,47.75 117.799,47.75 117.799,47.68 117.799,47.124 117.675,47 ; J1.D9@118,47.25 ccw(c118,47.069) 117.872,47.197 117.675,47 ; 98.933,45.796 99.212,45.517 102.973,45.517 103.062,45.607 103.062,46.977 103.315,47.23 103.673,47.23 103.926,46.977 103.926,45.607 104.015,45.517 104.141,45.517 104.231,45.607 104.231,46.977 104.484,47.23 104.841,47.23 105.094,46.977 105.094,45.607 105.183,45.517 105.31,45.517 105.399,45.607 105.399,46.977 105.652,47.23 106.01,47.23 106.263,46.977 106.263,45.607 106.352,45.517 106.478,45.517 106.567,45.607 106.567,46.977 106.82,47.23 107.178,47.23 107.431,46.977 107.431,45.607 107.52,45.517 107.646,45.517 107.736,45.607 107.736,46.977 107.989,47.23 108.346,47.23 108.599,46.977 108.599,45.607 108.689,45.517 108.815,45.517 108.904,45.607 108.904,46.977 109.157,47.23 109.515,47.23 109.768,46.977 109.768,45.607 109.857,45.517 109.983,45.517 110.073,45.607 110.073,46.977 110.326,47.23 110.683,47.23 110.936,46.977 110.936,45.607 111.025,45.517 111.152,45.517 111.241,45.607 111.241,47.209 111.494,47.462 111.852,47.462 112.105,47.209 112.105,45.607 112.194,45.517 112.32,45.517 112.409,45.607 112.409,49.443 112.674,49.708 113.106,49.708 113.386,49.428 113.386,47.371 113.877,46.88 115.071,46.88 115.71,47.519 116.391,47.519 117.03,46.88 117.555,46.88 117.629,46.954 ; 117.629,46.954 ccw(c117.518,47.065) 117.675,47.065 J1.D9@117.675,47.202 ; J1.D9@117.675,47.202 J1.D9@117.7,47.177 ; 117.675,47 ccw(c117.615,47.06) 117.7,47.06 J1.D9@117.7,47.177
DI3-: J1.D10 U19.93 | length 58
  Top Layer w0.152: U19.93@94.039,45.493 94.915,45.493 ; U19.93@94.689,45.493 94.915,45.493 ; v1(95.883,45.354) 95.507,45.354 95.353,45.507 94.93,45.507 94.915,45.493
  Bottom Layer w0.152: v1(95.883,45.354) 96.132,45.603 98.745,45.603 99.11,45.238 103.089,45.238 103.342,45.491 103.342,46.862 103.431,46.951 103.557,46.951 103.646,46.862 103.646,45.491 103.899,45.238 104.257,45.238 104.51,45.491 104.51,46.862 104.599,46.951 104.725,46.951 104.815,46.862 104.815,45.491 105.068,45.238 105.425,45.238 105.678,45.491 105.678,46.862 105.768,46.951 105.894,46.951 105.983,46.862 105.983,45.491 106.236,45.238 106.594,45.238 106.847,45.491 106.847,46.862 106.936,46.951 107.062,46.951 107.152,46.862 107.152,45.491 107.405,45.238 107.762,45.238 108.015,45.491 108.015,46.862 108.104,46.951 108.231,46.951 108.32,46.862 108.32,45.491 108.573,45.238 108.931,45.238 109.184,45.491 109.184,46.862 109.273,46.951 109.399,46.951 109.488,46.862 109.488,45.491 109.741,45.238 110.099,45.238 110.352,45.491 110.352,46.862 110.441,46.951 110.567,46.951 110.657,46.862 110.657,45.491 110.91,45.238 111.267,45.238 111.52,45.491 111.52,47.093 111.61,47.183 111.736,47.183 111.825,47.093 111.825,45.491 112.078,45.238 112.436,45.238 112.689,45.491 112.689,49.316 112.801,49.428 113.005,49.428 113.106,49.327 113.106,47.219 113.741,46.584 115.087,46.584 115.71,45.961 116.391,45.961 117.03,46.6 117.555,46.6 117.717,46.438 ; J1.D10@117.55,45.975 ccw(c117.148,46.377) 117.717,46.377 117.717,46.438 ; J1.D10@117.8,45.72 117.8,46.355 ; J1.D10@118.088,46.067 cw(c117.695,45.675) J1.D10@118.25,45.675 ; J1.D10@118.087,46.067 117.8,46.355 ; 117.717,46.438 117.8,46.355
DI4+: J1.A9 U19.92 | length 77.3
  Top Layer w0.152: U19.92@94.039,44.993 94.915,44.993 ; U19.92@94.689,44.993 94.915,44.993 ; 112.999,44.069 112.999,43.281 112.909,43.191 112.783,43.191 112.694,43.281 112.694,44.187 112.441,44.44 112.083,44.44 111.83,44.187 111.83,43.502 111.741,43.413 111.615,43.413 111.525,43.502 111.525,44.187 111.273,44.44 110.915,44.44 110.662,44.187 110.662,43.502 110.573,43.413 110.446,43.413 110.357,43.502 110.357,44.186 110.104,44.439 109.746,44.439 109.493,44.186 109.493,43.502 109.404,43.413 109.278,43.413 109.189,43.502 109.189,44.187 108.936,44.44 108.578,44.44 108.325,44.187 108.325,43.502 108.236,43.413 108.11,43.413 108.02,43.502 108.02,44.185 107.767,44.438 107.41,44.438 107.157,44.185 107.157,43.502 107.067,43.413 106.941,43.413 106.852,43.502 106.852,44.183 106.599,44.436 106.241,44.436 105.988,44.183 105.988,43.577 105.899,43.488 105.773,43.488 105.683,43.577 105.683,44.961 105.431,45.214 105.073,45.214 104.82,44.961 104.82,44.736 104.731,44.646 104.604,44.646 104.515,44.736 104.515,45.777 104.262,46.029 103.904,46.029 103.651,45.777 103.651,44.948 103.562,44.858 103.436,44.858 103.347,44.948 103.347,46.522 103.094,46.775 102.736,46.775 102.483,46.522 102.483,44.948 102.394,44.858 102.268,44.858 102.178,44.948 102.178,46.522 101.925,46.775 101.568,46.775 101.315,46.522 101.315,44.948 101.225,44.858 101.099,44.858 101.01,44.948 101.01,46.522 100.757,46.775 100.399,46.775 100.146,46.522 100.146,44.948 100.057,44.858 99.931,44.858 99.841,44.948 99.841,46.522 99.589,46.775 99.231,46.775 98.978,46.522 98.978,44.948 98.889,44.858 98.762,44.858 98.673,44.948 98.673,46.522 98.42,46.775 98.062,46.775 97.809,46.522 97.809,44.948 97.72,44.858 97.594,44.858 97.505,44.948 97.505,46.522 97.252,46.775 96.894,46.775 96.641,46.522 96.641,44.961 96.552,44.872 95.418,44.872 95.408,44.883 95.026,44.883 94.915,44.993 ; 113.005,44.069 113.233,44.298 114.63,44.298 115.151,44.819 115.151,45.606 115.418,45.872 116.484,45.872 117.408,44.949 118.533,44.949 118.643,45.06 118.643,47.777 118.897,48.031 119.355,48.031 120.066,47.32 120.65,47.32 121.641,48.311 122.301,48.311 123.266,49.276 124.358,49.276 124.663,48.971 124.663,48.565 125.044,48.184 125.628,48.184 125.781,48.031 125.781,47.828 125.628,47.676 123.85,47.676 123.836,47.691 J1.A9@123.825,47.701 ; J1.A9@124.15,47.375 124.373,47.598 cw(c124.573,47.397) 124.521,47.676 cw(c124.573,47.397) 124.573,47.681 ; J1.A9@124.15,47.975 124.353,47.772 ccw(c124.573,47.991) 124.573,47.681 ; 124.744,47.681 124.573,47.681
DI4-: J1.A10 U19.91 | length 77.4
  Top Layer w0.152: U19.91@94.039,44.493 94.915,44.493 ; U19.91@94.689,44.493 94.915,44.493 ; 123.197,46.288 cw(c122.707,45.798) 123.4,45.798 J1.A10@123.4,45.65 ; 123.259,46.226 ccw(c123.563,46.529) 123.316,46.178 ccw(c123.563,46.529) 123.563,46.1 J1.A10@123.825,46.1 ; J1.A10@123.85,45.644 123.835,45.66 123.088,46.406 123.088,48.031 123.495,48.438 124.257,48.438 124.333,48.514 124.333,48.87 124.231,48.971 123.419,48.971 122.428,47.981 121.768,47.981 120.802,47.015 119.939,47.015 119.228,47.727 119.05,47.727 118.923,47.6 118.923,44.907 118.694,44.679 117.246,44.679 116.357,45.568 115.545,45.568 115.418,45.441 115.418,44.704 114.732,44.018 113.411,44.018 113.278,43.885 113.278,43.165 113.025,42.912 112.667,42.912 112.414,43.165 112.414,44.072 112.325,44.161 112.199,44.161 112.11,44.072 112.11,43.386 111.857,43.133 111.499,43.133 111.246,43.386 111.246,44.071 111.157,44.161 111.031,44.161 110.941,44.071 110.941,43.386 110.688,43.133 110.331,43.133 110.078,43.386 110.078,44.071 109.988,44.16 109.862,44.16 109.773,44.071 109.773,43.386 109.52,43.133 109.162,43.133 108.909,43.386 108.909,44.071 108.82,44.16 108.694,44.16 108.604,44.071 108.604,43.386 108.352,43.133 107.994,43.133 107.741,43.386 107.741,44.069 107.652,44.158 107.525,44.158 107.436,44.069 107.436,43.386 107.183,43.133 106.825,43.133 106.572,43.386 106.572,44.067 106.483,44.157 106.357,44.157 106.268,44.067 106.268,43.462 106.015,43.209 105.657,43.209 105.404,43.462 105.404,44.845 105.315,44.934 105.189,44.934 105.099,44.845 105.099,44.62 104.846,44.367 104.489,44.367 104.236,44.62 104.236,45.661 104.146,45.75 104.02,45.75 103.931,45.661 103.931,44.832 103.678,44.579 103.32,44.579 103.067,44.832 103.067,46.406 102.978,46.495 102.852,46.495 102.762,46.406 102.762,44.832 102.51,44.579 102.152,44.579 101.899,44.832 101.899,46.406 101.81,46.495 101.683,46.495 101.594,46.406 101.594,44.832 101.341,44.579 100.983,44.579 100.73,44.832 100.73,46.406 100.641,46.495 100.515,46.495 100.426,46.406 100.426,44.832 100.173,44.579 99.815,44.579 99.562,44.832 99.562,46.406 99.473,46.495 99.347,46.495 99.257,46.406 99.257,44.832 99.004,44.579 98.647,44.579 98.394,44.832 98.394,46.406 98.304,46.495 98.178,46.495 98.089,46.406 98.089,44.832 97.836,44.579 97.478,44.579 97.225,44.832 97.225,46.406 97.136,46.495 97.01,46.495 96.92,46.406 96.92,44.845 96.668,44.592 95.036,44.592 95.026,44.603 94.915,44.493
DI5+: J1.F9 U19.90 | length 48.4
  Top Layer w0.152: U19.90@94.039,43.993 94.915,43.993 ; U19.90@94.689,43.993 94.915,43.993 ; v1(95.999,44.114) 95.75,43.865 95.434,43.865 95.417,43.883 95.026,43.883 94.915,43.993
  Bottom Layer w0.152: v1(95.999,44.114) 96.248,43.865 97.35,43.865 97.603,43.612 97.603,42.045 97.692,41.956 97.818,41.956 97.907,42.045 97.907,44.217 98.16,44.469 98.518,44.469 98.771,44.217 98.771,42.045 98.86,41.956 98.986,41.956 99.076,42.045 99.076,44.217 99.329,44.469 99.686,44.469 99.939,44.217 99.939,42.045 100.029,41.956 100.155,41.956 100.244,42.045 100.244,44.217 100.497,44.469 100.855,44.469 101.108,44.217 101.108,42.045 101.197,41.956 101.323,41.956 101.413,42.045 101.413,43.932 101.829,44.348 102.464,44.348 102.845,43.967 102.845,42.24 102.921,42.164 105.537,42.164 105.664,42.291 105.664,44.45 105.994,44.78 106.655,44.78 106.959,44.475 106.959,42.494 107.061,42.393 108.102,42.393 108.204,42.494 108.204,43.942 108.61,44.348 113.538,44.348 113.661,44.472 114.327,45.138 J1.F9@114.376,45.187 ; J1.F9@113.875,45.175 113.875,44.988 cw(c113.145,44.988) 113.662,44.473 cw(c114.213,43.92) 114.213,44.7 J1.F9@114.35,44.7
DI5-: J1.F10 U19.89 | length 48.6
  Top Layer w0.152: U19.89@94.039,43.493 94.915,43.493 ; U19.89@94.689,43.493 94.915,43.493 ; v1(95.999,43.337) 95.75,43.586 95.212,43.586 95.195,43.603 95.026,43.603 94.915,43.493
  Bottom Layer w0.152: v1(95.999,43.337) 96.248,43.586 97.234,43.586 97.323,43.497 97.323,41.929 97.576,41.677 97.934,41.677 98.187,41.929 98.187,44.101 98.276,44.19 98.402,44.19 98.492,44.101 98.492,41.929 98.744,41.677 99.102,41.677 99.355,41.929 99.355,44.101 99.444,44.19 99.571,44.19 99.66,44.101 99.66,41.929 99.913,41.677 100.271,41.677 100.524,41.929 100.524,44.101 100.613,44.19 100.739,44.19 100.828,44.101 100.828,41.929 101.081,41.677 101.439,41.677 101.692,41.929 101.692,43.78 101.967,44.055 102.324,44.055 102.567,43.812 102.567,42.112 102.794,41.885 105.715,41.885 105.943,42.113 105.943,44.323 106.121,44.501 106.528,44.501 106.68,44.348 106.68,42.367 106.934,42.113 108.255,42.113 108.483,42.342 108.483,43.815 108.724,44.055 113.425,44.055 113.654,43.826 ; J1.F10@113.9,43.025 113.9,43.233 ccw(c113.061,43.233) 113.655,43.825 ; J1.F10@114.351,43.155 114.325,43.155 113.655,43.825 ; J1.F10@114.4,43.55 114.32,43.55 cw(c114.32,44.492) 113.655,43.825
DI6+: J1.C9 U19.86 | length 67.6
  Top Layer w0.152: U19.86@94.689,41.993 94.915,41.993 95.026,41.883 96.428,41.883 96.517,41.972 96.517,44.048 96.77,44.301 97.128,44.301 97.381,44.048 97.381,41.974 97.47,41.885 97.596,41.885 97.685,41.974 97.685,44.048 97.938,44.301 98.296,44.301 98.549,44.048 98.549,41.974 98.638,41.885 98.765,41.885 98.854,41.974 98.854,44.048 99.107,44.301 99.465,44.301 99.717,44.048 99.717,41.974 99.807,41.885 99.933,41.885 100.022,41.974 100.022,44.048 100.275,44.301 100.633,44.301 100.886,44.048 100.886,41.974 100.975,41.885 101.101,41.885 101.191,41.974 101.191,44.048 101.444,44.301 101.801,44.301 102.054,44.048 102.054,41.974 102.144,41.885 102.27,41.885 102.359,41.974 102.359,44.048 102.612,44.301 102.97,44.301 103.223,44.048 103.223,41.57 103.312,41.48 103.438,41.48 103.527,41.57 103.527,44.048 103.78,44.301 104.138,44.301 104.391,44.048 104.391,41.57 104.468,41.493 104.696,41.721 104.696,42.906 104.949,43.159 105.307,43.159 105.559,42.906 105.559,41.97 105.649,41.88 105.775,41.88 105.864,41.97 105.864,42.592 106.117,42.845 106.475,42.845 106.728,42.592 106.728,41.97 106.817,41.88 106.943,41.88 107.033,41.97 107.033,42.592 107.286,42.845 107.643,42.845 107.896,42.592 107.896,42.135 107.986,42.045 108.112,42.045 108.201,42.135 108.201,42.593 108.381,42.773 ; 108.382,42.774 108.452,42.844 108.89,42.844 109.118,42.615 109.118,42.316 109.245,42.189 109.423,42.189 109.552,42.318 109.552,42.572 109.83,42.85 110.414,42.85 110.668,42.596 111.125,42.596 111.379,42.85 111.785,42.85 112.335,42.3 115.122,42.3 115.773,42.951 116.42,42.951 117.804,44.335 119.519,44.335 J1.C9@120.32,45.136 ; 119.687,44.497 cw(c120.177,44.007) 120.177,44.7 J1.C9@120.325,44.7 ; 119.749,44.559 ccw(c119.446,44.863) 119.788,44.604 ccw(c119.446,44.863) 119.875,44.863 J1.C9@119.875,45.125
DI6-: J1.C10 U19.85 | length 67.6
  Top Layer w0.152: U19.85@94.689,41.493 94.915,41.493 95.026,41.603 96.544,41.603 96.796,41.856 96.796,43.926 96.886,44.015 97.012,44.015 97.101,43.926 97.101,41.859 97.354,41.606 97.712,41.606 97.965,41.859 97.965,43.932 98.054,44.021 98.18,44.021 98.27,43.932 98.27,41.859 98.523,41.606 98.88,41.606 99.133,41.859 99.133,43.932 99.223,44.021 99.349,44.021 99.438,43.932 99.438,41.859 99.691,41.606 100.049,41.606 100.302,41.859 100.302,43.932 100.391,44.021 100.517,44.021 100.606,43.932 100.606,41.859 100.859,41.606 101.217,41.606 101.47,41.859 101.47,43.932 101.559,44.021 101.686,44.021 101.775,43.932 101.775,41.859 102.028,41.606 102.386,41.606 102.638,41.859 102.638,43.932 102.728,44.021 102.854,44.021 102.943,43.932 102.943,41.454 103.196,41.201 103.554,41.201 103.807,41.454 103.807,43.932 103.896,44.021 104.022,44.021 104.112,43.932 104.112,41.454 104.365,41.201 ; 104.369,41.199 104.371,41.201 104.571,41.201 104.975,41.605 104.975,42.791 105.065,42.88 105.191,42.88 105.28,42.791 105.28,41.854 105.533,41.601 105.891,41.601 106.144,41.854 106.144,42.476 106.233,42.565 106.359,42.565 106.448,42.476 106.448,41.854 106.701,41.601 107.059,41.601 107.312,41.854 107.312,42.476 107.401,42.566 107.528,42.566 107.617,42.476 107.617,42.019 107.87,41.766 108.228,41.766 108.48,42.019 108.48,42.415 108.63,42.564 108.742,42.564 108.866,42.44 108.866,42.212 109.141,41.937 109.528,41.937 109.804,42.213 109.804,42.443 109.957,42.596 110.311,42.596 110.563,42.343 111.23,42.343 111.482,42.596 111.658,42.596 112.233,42.021 115.249,42.021 115.9,42.672 116.536,42.672 117.933,44.069 119.411,44.069 120.345,43.135 J1.C10@120.345,43.129 ; 119.722,43.763 cw(c119.232,43.273) 119.769,43.711 cw(c119.232,43.273) 119.925,43.273 J1.C10@119.925,43.125 ; 119.784,43.701 ccw(c120.088,44.004) 120.088,43.575 120.325,43.575 J1.C10@120.35,43.575
DI7+: J1.D11 U19.84 | length 57.5
  Top Layer w0.152: U19.84@94.039,40.993 94.897,40.993 95.021,40.869 104.902,40.869 105.08,40.691 105.08,40.386 105.207,40.259 105.435,40.259 105.562,40.386 105.562,40.919 105.74,41.097 106.274,41.097 106.876,40.495 106.876,38.582 106.965,38.492 107.091,38.492 107.18,38.582 107.18,41.102 107.433,41.355 107.791,41.355 108.044,41.102 108.044,38.626 108.133,38.537 108.26,38.537 108.349,38.626 108.349,41.425 108.602,41.678 108.96,41.678 109.212,41.425 109.212,38.626 109.302,38.537 109.428,38.537 109.517,38.626 109.517,41.478 109.77,41.73 110.128,41.73 110.381,41.478 110.381,38.626 110.47,38.537 110.596,38.537 110.686,38.626 110.686,41.478 110.939,41.73 111.296,41.73 111.549,41.478 111.549,38.205 111.639,38.115 111.765,38.115 111.854,38.205 111.854,41.478 112.107,41.73 114.556,41.73 115.138,41.148 ; 114.844,41.442 115.757,40.528 116.677,40.528 117.831,41.681 117.831,41.852 ; J1.D11@117.525,42.275 117.748,42.052 cw(c117.547,41.852) 117.831,41.852 ; J1.D11@117.831,42.596 117.831,41.852 ; J1.D11@118.125,42.275 117.922,42.072 ccw(c118.141,41.852) 117.831,41.852